# Altium PCB NEW_PCB.pcbdoc (part 1 of 2)
Units mil, origin at the board's own origin, x right, y up, seen from the top; angles counter-clockwise.
Board outline 5031.34 x 4281.32 mil, 2 copper layers (Top Layer, Bottom Layer); 79 components, 50 nets, 361 pads, 74 vias.
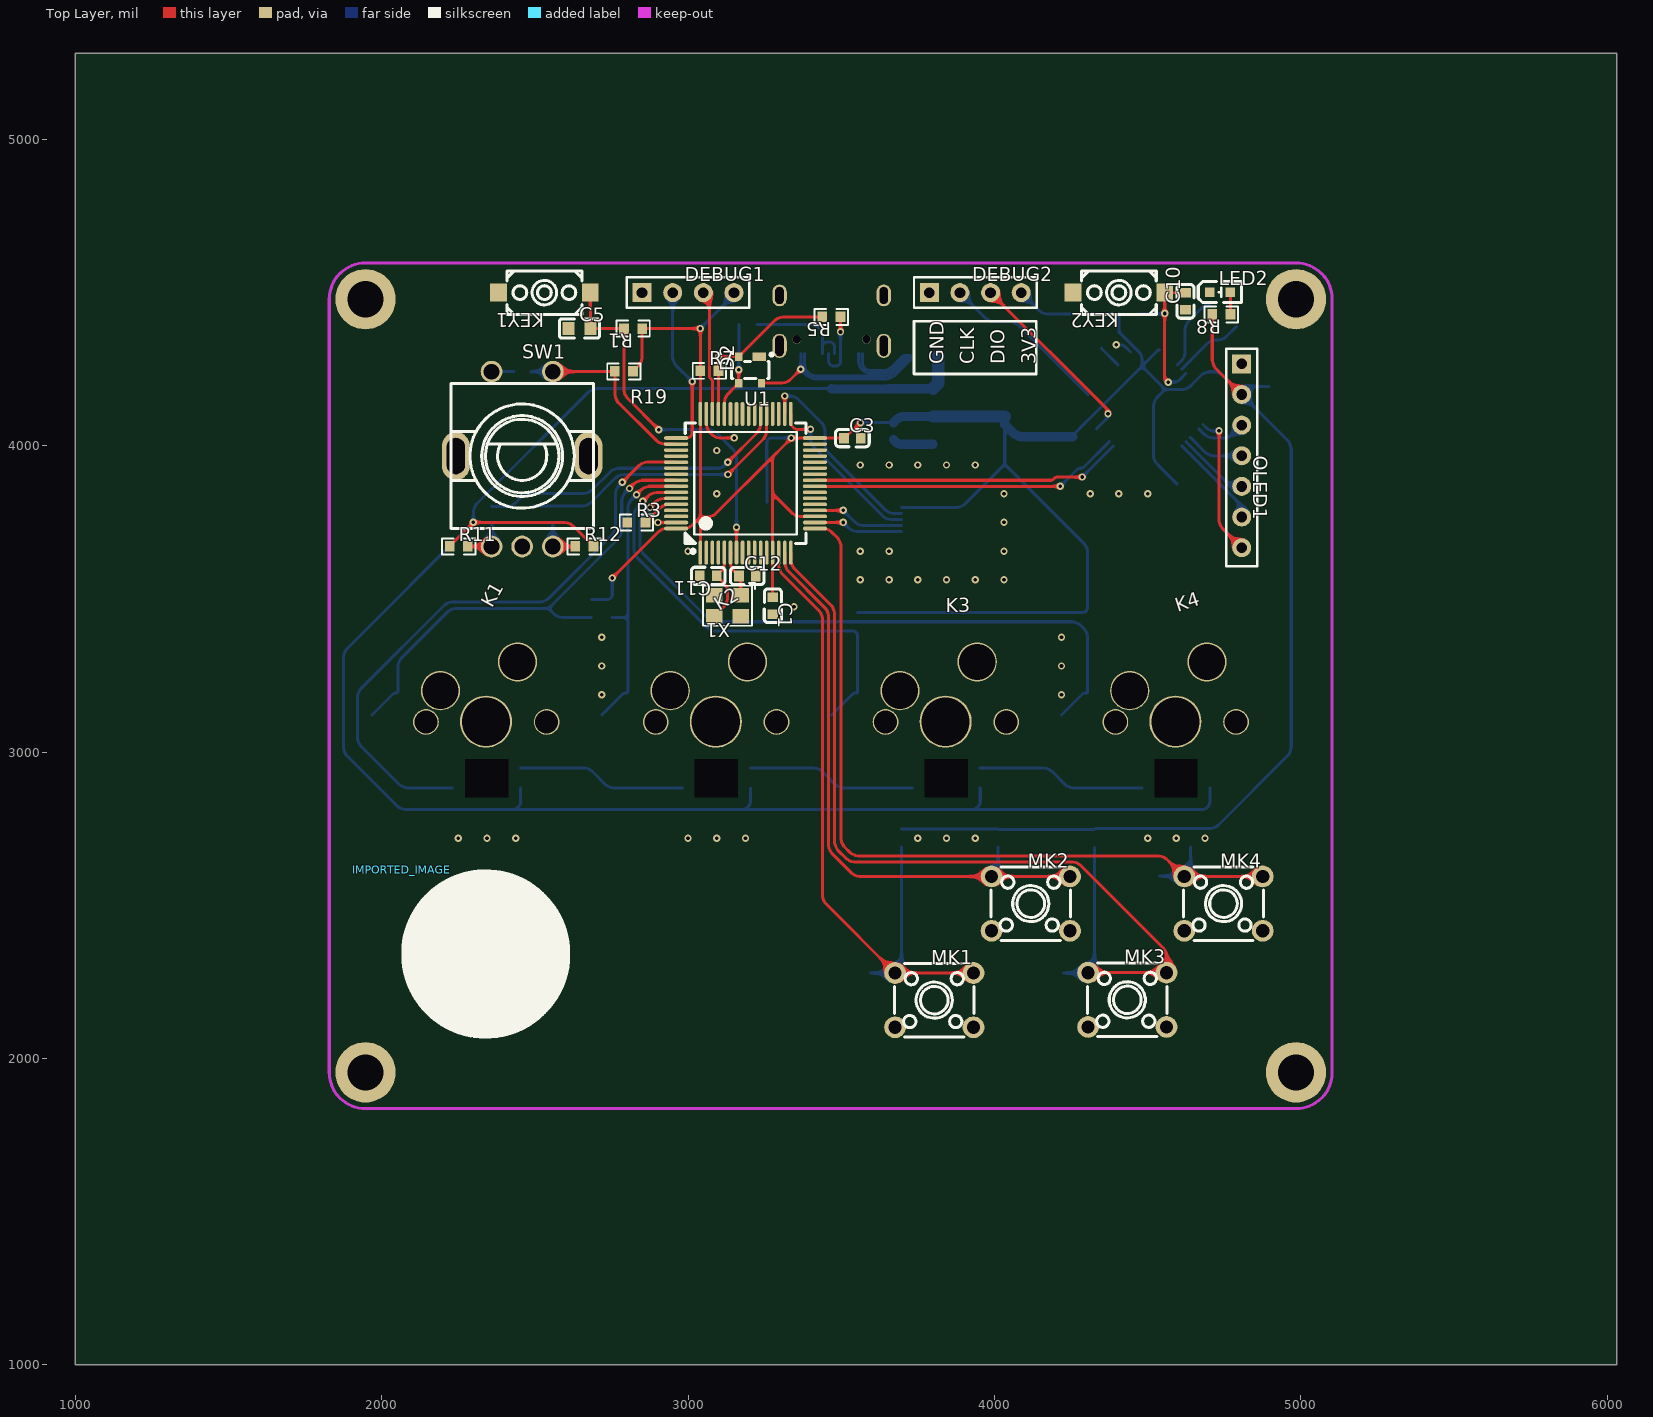
[diagram p0: Top Layer view]
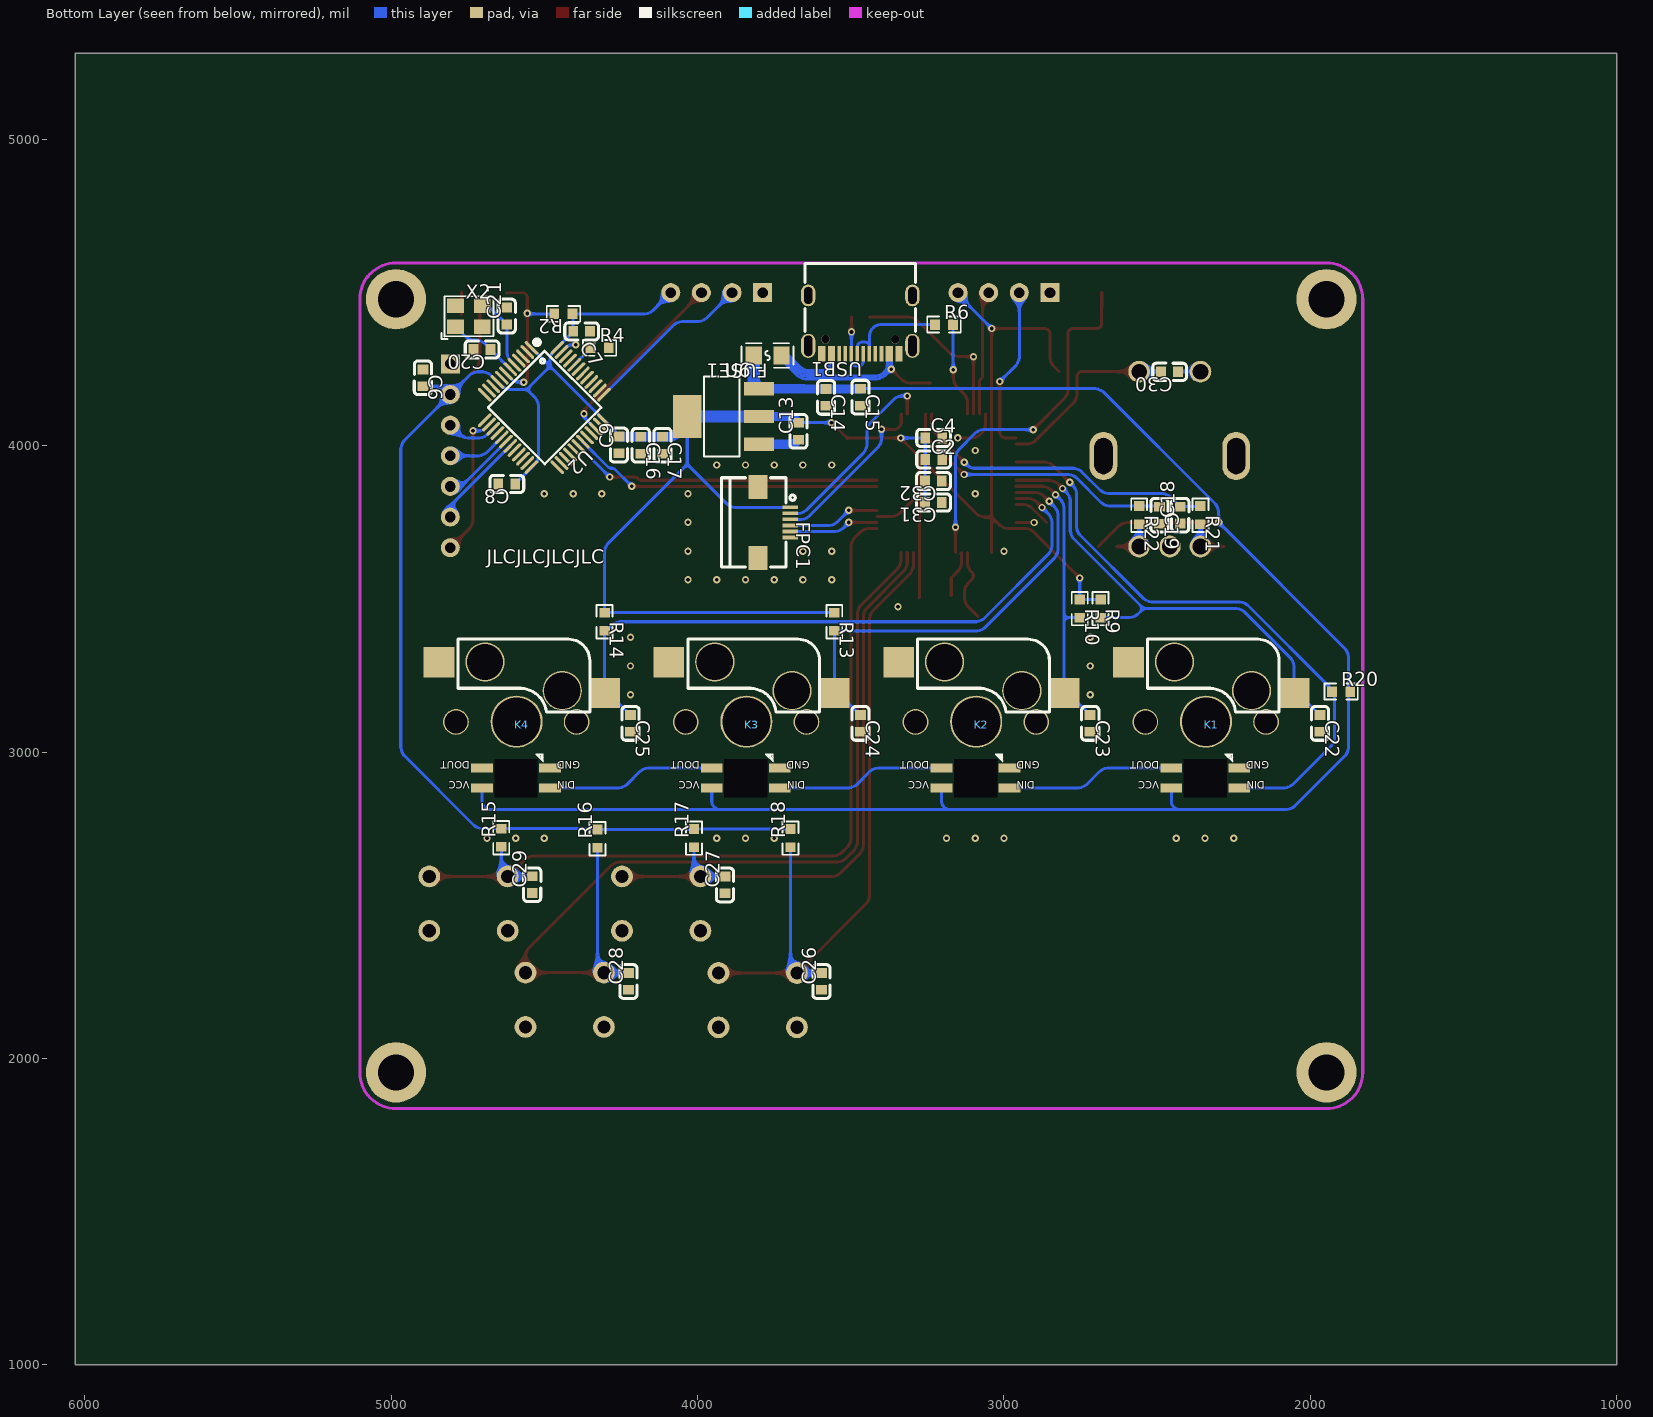
[diagram p1: Bottom Layer view, seen from below]

## Layer stack, top to bottom
Top Layer: signal copper (thickness not stored)
Dielectric: dielectric 12.6, FR-4, Dk 4.8
Bottom Layer: signal copper (thickness not stored)

## Board outline
6031.34,1000 1000,1000 1000,5281.32 6031.34,5281.32

## Components (designator, comment, footprint, x,y, rotation, side; value= is the part's Value field where it differs from the comment)
C1 "0.1u" C0603#1 3276.75,3477.78 r270 top
C2 "0.1u" C0603#2 3229.45,3955.38 r0 bottom
C3 "0.1u" C0603#1 3536.75,4024.78 r0 top
C4 "0.1u" C0603#2 3229.45,4025.78 r0 bottom
C5 "0.1u" C0603#3 2645.79,4382.78 r0 top
C6 "0.1u" C0603#2 4896.85,4221.78 r90 bottom
C7 "0.1u" C0603#2 4378.85,4373.78 r180 bottom
C8 "0.1u" C0603#2 4622.85,3875.78 r180 bottom
C9 "0.1u" C0603#2 4256.75,4002.78 r270 bottom
C10 "0.1u" C0603#1 4623.85,4471.78 r90 top
C11 "20pF" C0603#1 3065.79,3575.78 r180 top
C12 "20pF" C0603#1 3193.79,3574.78 r0 top
C13 "10u" C0603#2 3670.75,4047.78 r270 bottom
C14 "10u" C0603#2 3580.75,4157.78 r90 bottom
C15 "0.1u" C0603#2 3468.75,4158.78 r90 bottom
C16 "0.1u" C0603#2 4185.75,4001.78 r90 bottom
C17 "10u" C0603#2 4114.75,4001.78 r90 bottom
C18 "0.1u" C0603#2 2424.65,3773.88 r270 bottom
C19 "0.1u" C0603#2 2492.95,3773.28 r90 bottom
C20 "20p" C0603#2 4703.75,4314.78 r180 bottom
C21 "20p" C0603#2 4622.75,4423.78 r270 bottom
C22 "0.1u" C0603#2 1968.75,3093.78 r90 bottom
C23 "0.1u" C0603#2 2718.75,3093.78 r90 bottom
C24 "0.1u" C0603#2 3468.75,3093.78 r90 bottom
C25 "0.1u" C0603#2 4218.85,3093.78 r90 bottom
C26 "0.1u" C0603#2 3595.75,2251.78 r270 bottom
C27 "0.1u" C0603#2 3910.75,2566.78 r270 bottom
C28 "0.1u" C0603#2 4225.75,2251.78 r270 bottom
C29 "0.1u" C0603#2 4539.75,2567.78 r270 bottom
C30 "0.1u" C0603#2 2459.75,4241.78 r180 bottom
C31 "0.1u" C0603#2 3230.15,3814.78 r180 bottom
C32 "1u" C0603#2 3230.15,3885.18 r180 bottom
D2 "PRTR5V0U2X,215" SOT-143_L2.9-W1.3-P1.92-LS2.3-BR 3202.79,4247.78 r90 top
DEBUG1 "HDR-M-2.54_1x4" HDR-M-2.54_1X4 3000.05,4500.05 r0 top
DEBUG2 "HDR-M-2.54_1x4" HDR-M-2.54_1X4 3937.57,4500.05 r0 top
FPC1 "AFC01-S06FCA-00" FPC-SMD_P0.50-6P_AFC01-S06FCA-00 3750.05,3750.05 r90 bottom
FUSE1 "SMD0805B050TF" F0805 3771.79,4294.78 r180 bottom
IMPORTED_IMAGE "IMPORTED_IMAGE" IMPORTED_IMAGE 2064.98,2616.23 r0 top
K1 "凯华轴座下灯位" 凯华轴座下灯位 2340.86,3098.78 r0 top
K2 "凯华轴座下灯位" 凯华轴座下灯位 3090.88,3098.78 r0 top
K3 "凯华轴座下灯位" 凯华轴座下灯位 3840.89,3098.78 r0 top
K4 "凯华轴座下灯位" 凯华轴座下灯位 4590.91,3098.78 r0 top
KEY1 "K2-3.6×6.1_SMD" KEY-SMD_2P-L6.2-W3.6-LS8.0 2531.29,4500.05 r180 top
KEY2 "K2-3.6×6.1_SMD" KEY-SMD_2P-L6.2-W3.6-LS8.0 4406.33,4500.05 r180 top
LED2 "19-217/BHC-ZL1M2RY/3T" LED0603-R-RD_BLUE 4736.81,4501.78 r0 top
MK1 "K4-6×6_TH" KEY-TH_4P-L6.0-W6.0-P4.50-LS6.5 3803.79,2190.78 r0 top
MK2 "K4-6×6_TH" KEY-TH_4P-L6.0-W6.0-P4.50-LS6.5 4118.79,2505.78 r0 top
MK3 "K4-6×6_TH" KEY-TH_4P-L6.0-W6.0-P4.50-LS6.5 4433.79,2191.78 r0 top
MK4 "K4-6×6_TH" KEY-TH_4P-L6.0-W6.0-P4.50-LS6.5 4747.79,2505.78 r0 top
OLED1 "CONN_01X07" HDR-M-2.54_1X7 4807.35,3967.48 r270 top
R1 "10k" R0603#1 2820.75,4382.78 r180 top
R2 "10k" R0603#2 4437.85,4430.78 r180 bottom
R3 "10k" R0603#1 2831.75,3749.78 r0 top
R4 "10k" R0603#2 4319.85,4319.78 r0 bottom
R5 "22" R0603#1 3467.85,4420.78 r180 top
R6 "22" R0603#2 3195.75,4395.78 r0 bottom
R7 "1.5k" R0603#1 3069.75,4244.78 r0 top
R8 "1k" R0603#1 4740.85,4428.78 r180 top
R9 "10k" R0603#2 2684.75,3468.78 r90 bottom
R10 "10k" R0603#2 2752.75,3468.78 r90 bottom
R11 "10k" R0603#1 2251.75,3671.78 r0 top
R12 "10k" R0603#1 2661.75,3671.78 r0 top
R13 "10k" R0603#2 3553.75,3425.78 r90 bottom
R14 "10k" R0603#2 4303.75,3425.78 r90 bottom
R15 "10k" R0603#2 4640.75,2720.78 r270 bottom
R16 "10k" R0603#2 4326.75,2717.78 r270 bottom
R17 "10k" R0603#2 4011.75,2719.78 r270 bottom
R18 "10k" R0603#2 3696.75,2719.78 r270 bottom
R19 "10k" R0603#1 2790.79,4242.78 r0 top
R20 "10k" R0603#2 1899.75,3197.78 r0 bottom
R21 "10k" R0603#2 2358.75,3773.58 r90 bottom
R22 "10k" R0603#2 2558.75,3773.58 r90 bottom
SW1 "EC11E18244A5" SW-TH_EC11E18244A5 2458.79,3956.78 r0 top
U1 "STM32F303RBT6" LQFP-64_L10.0-W10.0-P0.50-LS12.0-BL 3187.79,3877.78 r0 top
U2 "STM32F030CCT6" LQFP-48_L7.0-W7.0-P0.50-LS9.0-BL 4500.08,4125.04 r135 bottom
U6 "AMS1117-3.3" SOT-223-3_L6.5-W3.4-P2.30-LS7.0-BR 3916.79,4095.78 r0 bottom
USB1 "KH-TYPE-C-16P" USB-C-SMD_KH-TYPE-C-16P 3468.81,4395.78 r180 bottom
X1 "8MHz" OSC-SMD_4P-L3.2-W2.5-BL#1 3128.79,3477.78 r180 top
X2 "8MHz" OSC-SMD_4P-L3.2-W2.5-BL#2 4746.32,4423.31 r0 bottom

## Footprints (in the part's own frame and the unit in brackets; to place one, negate y for a bottom-side part, rotate by r counter-clockwise, add the part's x,y. Pads: shape width x height; smd on the part's side, far side on the other; paste and mask are expansions set on the pad)
C0603#1 [mm]
  rect 0.8x0.9 smd paste+0 mask+0.051: 1(-0.7,0) 2(0.7,0)
  silkscreen extent -1.41,-0.71 1.39,0.72
C0603#2 [mm]
  rect 0.8x0.9 smd paste+0 mask+0.051: 1(0.7,0) 2(-0.7,0)
  silkscreen extent -1.39,-0.72 1.41,0.71
C0603#3 [mm]
  rect 1x1.1 smd paste+0 mask+0.102: 1(-0.9,0) 2(0.9,0)
  silkscreen extent -1.65,-0.8 1.65,0.8
F0805 [mm]
  rect 1.335x1.5 smd paste-100 mask+0.051: 1(1.142,0) 2(-1.142,0)
  silkscreen extent -2.16,-1.02 2.16,1.02
FPC-SMD_P0.50-6P_AFC01-S06FCA-00 [mm]
  rect 0.3x1.3 smd paste+0 mask+0.051: 1(1.248,-1.339) 2(0.748,-1.339) 3(0.248,-1.339) 4(-0.252,-1.339) 5(-0.752,-1.339) 6(-1.252,-1.339)
  rect 2x1.6 smd paste+0 mask+0.051: 7(2.95,1.339) 8(-2.95,1.339)
  silkscreen extent -3.7,-1.75 3.72,4.36
HDR-M-2.54_1X4 [mil]
  rect 62x62 hole 35 paste+0 mask+2: 1(-150,0)
  round 62 hole 35 paste+0 mask+2: 2(-50,0) 3(50,0) 4(150,0)
  silkscreen extent -200,-50 200,50
HDR-M-2.54_1X7 [mil]
  rect 62x62 hole 35 paste+0 mask+2: 1(-300,0)
  round 62 hole 35 paste+0 mask+2: 2(-200,0) 3(-100,0) 4(0,0) 5(100,0) 6(200,0) 7(300,0)
  silkscreen extent -350,-50 360,50
IMPORTED_IMAGE [mil]
  silkscreen extent 0,-550 550,0
KEY-SMD_2P-L6.2-W3.6-LS8.0 [mm]
  rect 1.4x1.5 smd paste+0 mask+0.051: 1(-3.8,0) 2(3.8,0)
  silkscreen extent -3.1,-1.8 3.1,1.8
KEY-TH_4P-L6.0-W6.0-P4.50-LS6.5 [mm]
  round 1.8 hole 1.1 paste+0 mask+0.051: 1(-3.251,-2.25) 2(3.251,-2.25) 3(3.251,2.25) 4(-3.251,2.25)
  silkscreen extent -3.3,-3.05 3.3,3.05
LED0603-R-RD_BLUE [mm]
  rect 0.8x0.8 smd paste+0 mask+0.051: 1(0.851,0) 2(-0.851,0)
  silkscreen extent -1.82,-0.86 1.77,0.86
LQFP-48_L7.0-W7.0-P0.50-LS9.0-BL [mm]
  oval 0.27x1.5 smd paste+0 mask+0.05: 1(2.75,4.25) 2(2.25,4.25) 3(1.75,4.25) 4(1.25,4.25) 5(0.75,4.25) 6(0.25,4.25) 7(-0.25,4.25) 8(-0.75,4.25) 9(-1.25,4.25) 10(-1.75,4.25) 11(-2.25,4.25) 12(-2.75,4.25) 25(-2.75,-4.25) 26(-2.25,-4.25) 27(-1.75,-4.25) 28(-1.25,-4.25) 29(-0.75,-4.25) 30(-0.25,-4.25) 31(0.25,-4.25) 32(0.75,-4.25) 33(1.25,-4.25) 34(1.75,-4.25) 35(2.25,-4.25) 36(2.75,-4.25)
  oval 1.5x0.27 smd paste+0 mask+0.05: 13(-4.25,2.75) 14(-4.25,2.25) 15(-4.25,1.75) 16(-4.25,1.25) 17(-4.25,0.75) 18(-4.25,0.25) 19(-4.25,-0.25) 20(-4.25,-0.75) 21(-4.25,-1.25) 22(-4.25,-1.75) 23(-4.25,-2.25) 24(-4.25,-2.75) 37(4.25,-2.75) 38(4.25,-2.25) 39(4.25,-1.75) 40(4.25,-1.25) 41(4.25,-0.75) 42(4.25,-0.25) 43(4.25,0.25) 44(4.25,0.75) 45(4.25,1.25) 46(4.25,1.75) 47(4.25,2.25) 48(4.25,2.75)
  silkscreen extent -3.3,-3.34 3.59,4.46
LQFP-64_L10.0-W10.0-P0.50-LS12.0-BL [mm]
  oval 0.3x2 smd paste+0 mask+0.051: 1(-3.75,-5.75) 2(-3.25,-5.75) 3(-2.75,-5.75) 4(-2.25,-5.75) 5(-1.75,-5.75) 6(-1.25,-5.75) 7(-0.75,-5.75) 8(-0.25,-5.75) 9(0.25,-5.75) 10(0.75,-5.75) 11(1.25,-5.75) 12(1.75,-5.75) 13(2.25,-5.75) 14(2.75,-5.75) 15(3.25,-5.75) 16(3.75,-5.75) 33(3.75,5.75) 34(3.25,5.75) 35(2.75,5.75) 36(2.25,5.75) 37(1.75,5.75) 38(1.25,5.75) 39(0.75,5.75) 40(0.25,5.75) 41(-0.25,5.75) 42(-0.75,5.75) 43(-1.25,5.75) 44(-1.75,5.75) 45(-2.25,5.75) 46(-2.75,5.75) 47(-3.25,5.75) 48(-3.75,5.75)
  oval 2x0.3 smd paste+0 mask+0.051: 17(5.75,-3.75) 18(5.75,-3.25) 19(5.75,-2.75) 20(5.75,-2.25) 21(5.75,-1.75) 22(5.75,-1.25) 23(5.75,-0.75) 24(5.75,-0.25) 25(5.75,0.25) 26(5.75,0.75) 27(5.75,1.25) 28(5.75,1.75) 29(5.75,2.25) 30(5.75,2.75) 31(5.75,3.25) 32(5.75,3.75) 49(-5.75,3.75) 50(-5.75,3.25) 51(-5.75,2.75) 52(-5.75,2.25) 53(-5.75,1.75) 54(-5.75,1.25) 55(-5.75,0.75) 56(-5.75,0.25) 57(-5.75,-0.25) 58(-5.75,-0.75) 59(-5.75,-1.25) 60(-5.75,-1.75) 61(-5.75,-2.25) 62(-5.75,-2.75) 63(-5.75,-3.25) 64(-5.75,-3.75)
  silkscreen extent -5,-5.79 5,5
OSC-SMD_4P-L3.2-W2.5-BL#1 [mm]
  rect 1.4x1.2 smd paste+0 mask+0.051: 1(-1.1,-0.875) 2(1.1,-0.875) 3(1.1,0.875) 4(-1.1,0.875)
  silkscreen extent -2.29,-1.9 2.03,1.65
OSC-SMD_4P-L3.2-W2.5-BL#2 [mm]
  rect 1.4x1.2 smd paste+0 mask+0.051: 1(1.1,0.875) 2(-1.1,0.875) 3(-1.1,-0.875) 4(1.1,-0.875)
  silkscreen extent -2.03,-1.65 2.29,1.9
R0603#1 [mil]
  rect 31.75x34.02 smd paste-3937.01 mask+2: 1(-29.66,0) 2(29.65,0)
  silkscreen extent -55,-26 55,26
R0603#2 [mil]
  rect 31.75x34.02 smd paste-3937.01 mask+2: 1(29.65,0) 2(-29.66,0)
  silkscreen extent -55,-26 55,26
SOT-143_L2.9-W1.3-P1.92-LS2.3-BR [mm]
  rect 0.7x1.1 smd paste+0 mask+0.051: 1(1.1,-0.75)
  rect 0.7x0.6 smd paste+0 mask+0.051: 2(1.1,0.95) 3(-1.1,0.95) 4(-1.1,-0.95)
  silkscreen extent -0.7,-1.91 1.4,1.55
SOT-223-3_L6.5-W3.4-P2.30-LS7.0-BR [mm]
  rect 2.5x1.1 smd paste+0 mask+0.051: 1(-2.97,2.3) 2(-2.97,0) 3(-2.97,-2.3)
  rect 2.34x3.6 smd paste+0 mask+0.051: 4(2.97,0)
  silkscreen extent -1.37,-3.33 1.57,3.33
SW-TH_EC11E18244A5 [mm]
  oval 2.3x4 hole 1.5 slot 3 at 90 deg paste+0 mask+0.051: 6(5.5,0.25) 7(-5.5,0.25)
  round 1.8 hole 1.3 paste+0 mask+0.051: A(-2.54,-7.25) B(2.54,-7.25) C(0,-7.25) D(-2.54,7.25) E(2.54,7.25)
  silkscreen extent -5.9,-5.75 5.9,6.25
USB-C-SMD_KH-TYPE-C-16P [mm]
  oval 1.2x2 hole 0.7 slot 1.7 at 90 deg paste+0 mask+0.051: 1(4.32,-1.765) 2(-4.32,-1.765)
  oval 1.2x1.8 hole 0.7 slot 1.4 at 90 deg paste+0 mask+0.051: 3(4.32,2.415) 4(-4.32,2.415)
  rect 0.3x1.3 smd paste-100 mask+0.05: A1(3.35,-2.415) A4(2.55,-2.415) A5(1.25,-2.415) A6(0.25,-2.415) A7(-0.25,-2.415) A8(-1.25,-2.415) A9(-2.55,-2.415) A12(-3.35,-2.415) B1(-3.05,-2.415) B4(-2.25,-2.415) B5(-1.75,-2.415) B6(-0.75,-2.415) B7(0.75,-2.415) B8(1.75,-2.415) B9(2.25,-2.415) B12(3.05,-2.415)
  round 0.7 hole 0.7 unplated paste+0: ""(-2.89,-1.235) ""(2.89,-1.235)
  silkscreen extent -4.57,-0.57 4.57,5.08
凯华轴座下灯位 [mil]
  rect 100.39x98.42 smd far side paste+0 mask+4: COL(-287.08,95) ROW(252.92,195)
  rect 70.87x29.53 smd far side paste+0 mask+4: DIN(-109.08,-215) DOUT(112.92,-150) GND(-109.08,-150) VCC(112.92,-215)
  round 84 hole 74.8 unplated paste+0 mask+4: ""(-196.08,0) ""(197.92,0)
  round 128 hole 118.11 paste+0 mask+4: ""(-149.08,102) ""(102.92,196)
  round 170 hole 157.48 paste+0 mask+4: ""(-0.08,1)
  Multi-Layer board cut-out: 71.92,-246 71.92,-121.59 -68.24,-121.59 -68.24,-246

## Free pads (board coordinates)
  rect 11.81x51.18 smd paste+0 mask+2: 2(3079.52,4104.14)
  round 196.85 hole 118.11 paste+0 mask+2: 3(1947.15,4478.57) 4(1947.15,1954.99) 5(4984.52,1954.99) 6(4984.52,4478.57)

## Via types
v1: diameter 24, hole 12, Top Layer to Bottom Layer, tented both sides, 74 vias

## Nets (pads, with @x,y where several pads share a name; then routed paths per layer and width w, separated by ;. In a path a pad name is that pad's centre, name@x,y a point inside that pad or via, vN(x,y) a via of type N, cw(c..) or ccw(c..) an arc to the next point about the centre after c; other vN are vias at no path point)
+5V: C14.1 C15.1 FUSE1.2 K1.VCC K2.VCC K3.VCC K4.VCC R11.1 R12.2 R20.2 U6.3 | length 6632.5
  Top Layer w10: R11.1@2222.09,3671.78 2222.14,3672.78 v1(2299.41,3750.05) 2598.51,3750.05 2607.49,3748.26 2615.94,3744.76 2623.55,3739.68 R12.2@2691.4,3671.78 ; 2290.87,3741.51 cw(c2311.47,3720.91) 2311.47,3750.05
  Bottom Layer w10: 2290.91,3741.55 ccw(c2270.3,3762.16) 2299.45,3762.16 ; 2425.45,2812.53 ccw(c2425.45,2841.67) 2446.06,2821.06 ; K1.VCC@2453.78,2883.78 2453.78,2837.55 2452.71,2832.18 2450.62,2827.14 2447.58,2822.59 2437.52,2812.53 ; 3175.47,2812.53 ccw(c3175.47,2841.67) 3196.07,2821.06 ; K2.VCC@3203.79,2883.78 3203.8,2837.55 3202.73,2832.19 3200.64,2827.14 3197.6,2822.59 3187.54,2812.53 ; C15.1@3459.8,4186.38 2701.01,4186.38 2692.04,4184.6 2683.59,4181.09 2675.98,4176.01 2309.82,3809.85 2304.73,3802.24 2301.23,3793.79 2299.45,3784.82 2299.45,3750.09 1885.38,3336.02 1880.29,3328.41 1876.79,3319.96 1875.01,3310.99 1875.01,3014.7 1876.79,3005.72 1880.29,2997.27 1885.38,2989.66 2052.14,2822.9 2059.75,2817.81 2068.2,2814.31 2077.18,2812.53 2437.52,2812.53 ; 3925.48,2812.53 ccw(c3925.48,2841.67) 3946.09,2821.06 ; K3.VCC@3953.81,2883.78 3953.81,2837.54 3952.74,2832.18 3950.65,2827.13 3947.61,2822.59 3937.55,2812.53 ; K4.VCC@4703.82,2883.78 4703.83,2837.55 4702.76,2832.19 4700.67,2827.14 4697.63,2822.59 4693.76,2818.72 4689.22,2815.69 4684.17,2813.59 4678.81,2812.53 3937.55,2812.53 ; 2437.52,2812.53 3187.54,2812.53 ; 3187.54,2812.53 3937.55,2812.53
  Bottom Layer w30: C15.1@3468.8,4186.33 3469.8,4185.33 3580.8,4185.33 3653.35,4185.33 3654.34,4186.33 U6.3@3799.86,4186.33 ; U6.3@3779.28,4186.33 ccw(c3779.28,4218.8) U6.3@3802.24,4195.84
  Bottom Layer w40: U6.3@3799.85,4186.38 3816.75,4203.28 FUSE1.2@3816.75,4294.78 ; U6.3@3805.77,4192.31 ccw(c3779.28,4218.8) 3816.75,4218.8
ADC1: FPC1.5 U1.18 | length 293.3
  Top Layer w10: U1.18@3414.15,3749.78 3468.79,3749.89 v1@3506.25,3749.97
  Bottom Layer w10: v1(3506.43,3749.97) 3525.58,3730.81 3533.19,3725.73 3541.64,3722.22 3550.61,3720.44 FPC1.5@3697.32,3720.44
ADC2: FPC1.4 U1.20 | length 301.8
  Top Layer w10: U1.20@3414.17,3789.2 v1@3506.59,3789.19
  Bottom Layer w10: v1(3506.43,3789.19) 3545.12,3750.49 3552.73,3745.41 3561.18,3741.91 3570.16,3740.12 FPC1.4@3697.32,3740.12
ADC3: FPC1.3 U1.33 | length 547.9
  Top Layer w10: U1.33@3335.43,4104.15 3335.43,4073.42 3339.16,4064.41 3346.06,4057.51 3355.07,4053.78 v1(3399.8,4053.78)
  Bottom Layer w10: v1@3399.75,4053.78 3399.75,4021.24 3401.53,4012.27 3405.03,4003.82 3410.12,3996.21 3636.15,3770.18 3643.76,3765.1 3652.21,3761.59 3661.18,3759.81 FPC1.3@3697.32,3759.81
ADC4: FPC1.2 U1.34 | length 636.2
  Top Layer w10: U1.34@3315.8,4104.2 v1(3315.8,4162.78)
  Bottom Layer w10: v1@3315.75,4162.78 3336.17,4162.78 3343.87,4161.25 3351.12,4158.25 3357.64,4153.89 3437.38,4074.15 3442.46,4066.54 3445.96,4058.09 3447.75,4049.11 3447.75,4002.44 3449.53,3993.47 3453.03,3985.02 3458.11,3977.41 3645.67,3789.86 3653.28,3784.78 3661.73,3781.28 3670.7,3779.49 FPC1.2@3697.32,3779.49
DN: R6.1 USB1.A7 USB1.B7 | length 366.5
  Bottom Layer w10: R6.1@3225.4,4395.78 3404.92,4395.78 3412.36,4394.25 3419.34,4391.26 3425.58,4386.93 3430.84,4381.41 3434.96,4374.99 3437.8,4367.89 3439.25,4360.38 3439.25,4329.28 ; USB1.B7@3439.25,4300.68 3439.25,4329.28 ; USB1.A7@3478.65,4300.69 3478.65,4325.24 3476.07,4331.45 3471.32,4336.21 3465.11,4338.78 3452.24,4338.78 3446.28,4336.31 3439.25,4329.28
DP: R5.1 USB1.A6 USB1.B6 | length 224.9
  Top Layer w10: v1@3497.45,4372.18 R5.1@3497.45,4420.78
  Bottom Layer w10: USB1.A6@3458.95,4300.68 3458.95,4274.2 3461.52,4268.03 3466.28,4263.33 3472.47,4260.78 3485.36,4260.78 3491.32,4263.25 3495.88,4267.81 3498.35,4273.77 USB1.B6@3498.34,4300.7 ; USB1.B6@3497.85,4301.18 v1(3497.81,4371.78)
EC11A: C18.2 R21.1 U1.38 | length 1022.9
  Top Layer w10: v1(3129.8,3946.78) 3226.68,4043.66 3231.76,4051.27 3235.26,4059.72 3237.05,4068.7 U1.38@3237.05,4104.18
  Bottom Layer w10: R21.1@2358.79,3803.28 2360.59,3801.49 2410.01,3801.49 2418.98,3803.27 2427.43,3806.77 2435.04,3811.85 2456.62,3833.43 2464.22,3838.51 2472.68,3842.01 2481.65,3843.8 2660.1,3843.8 2669.08,3845.59 2677.53,3849.09 2685.14,3854.17 2747.38,3916.41 2754.98,3921.49 2763.44,3924.99 2772.41,3926.78 3098.97,3926.78 3105.57,3928.09 3111.78,3930.66 3117.37,3934.4 v1@3129.75,3946.78
EC11B: C19.1 R22.1 U1.37 | length 925.8
  Top Layer w10: v1(3130.25,3906.28) 3246.28,4022.31 3251.36,4029.92 3254.86,4038.37 3256.65,4047.34 U1.37@3256.65,4104.18
  Bottom Layer w10: C19.1@2492.91,3800.88 2495.32,3803.29 2558.79,3803.29 2656.59,3803.29 2665.56,3805.07 2674.01,3808.57 2681.62,3813.66 2764.38,3896.41 2771.99,3901.49 2780.44,3904.99 2789.41,3906.76 v1(3130.25,3906.28)
GND: C1.2 C2.2 C3.2 C4.2 C5.1 C6.1 C7.1 C8.2 C9.1 C10.1 C11.2 C12.2 C13.1 C14.2 C15.2 C16.2 C17.2 C18.1 C19.2 C20.2 C21.2 C22.2 C23.2 C24.2 C25.2 C26.1 C27.1 C28.1 C29.1 C30.1 C31.1 C32.1 D2.1 DEBUG1.1 DEBUG2.1 FPC1.6 K1.GND K1.ROW K2.GND K2.ROW K3.GND K3.ROW K4.GND K4.ROW KEY1.2 KEY2.2 LED2.2 MK1.1 MK1.2 MK2.1 MK2.2 MK3.1 MK3.2 MK4.1 MK4.2 OLED1.1 pad.3 pad.4 pad.5 pad.6 R3.1 R4.2 SW1.6 SW1.7 SW1.C SW1.D U1.12 U1.31 U1.47 U1.63 U2.8 U2.23 U2.35 U2.47 U6.1 USB1.1 USB1.2 USB1.3 USB1.4 USB1.A1 USB1.A12 USB1.B1 USB1.B12 X1.2 X1.4 X2.2 X2.4 | length 470.9
  Top Layer w10: v1(2901.8,3749.78) U1.63@2961.42,3749.82 ; U1.47@3059.84,4104.15 3059.84,4069.39 3061.62,4060.42 3065.12,4051.97 3070.2,4044.36 3078.42,4036.15 3086.03,4031.07 3094.48,4027.57 3103.45,4025.78 v1(3150.8,4025.78) ; U1.63@2961.42,3749.82 U1.63@2961.42,3749.82
  Bottom Layer w10: SW1.D@2358.79,4242.21 C30.1@2431.81,4242.21 ; v1(4397.8,4329.78) 4411.91,4329.78 4417.23,4328.72 4422.24,4326.65 4426.76,4323.63 U2.47@4444.4,4305.99
  Bottom Layer w30: C13.1@3670.79,4020.22 3680.07,4010.94 3684.26,4008.14 3688.91,4006.21 3693.86,4005.23 U6.1@3799.86,4005.22
  other v1: 2250.02,2718.78 2343.77,2718.78 2437.52,2718.78 3000.04,2718.78 3093.79,2718.78 3187.54,2718.78 3750.05,2718.78 3843.8,2718.78 3937.56,2718.78 4500.07,2718.78 4593.82,2718.78 4687.57,2718.78 2718.78,3187.54 4218.81,3187.54 2718.78,3281.29 4218.81,3281.29 2718.78,3375.04 4218.81,3375.04 3345.8,3474.78 3562.55,3562.54 3656.3,3562.54 3750.05,3562.54 3750.05,3562.54 3843.8,3562.54 3937.56,3562.54 4031.31,3562.54 3000.04,3656.3 3562.55,3656.3 3656.3,3656.3 4031.31,3656.3 4031.31,3750.05 3093.79,3843.8 4031.31,3843.8 4312.56,3843.8 4406.32,3843.8 4500.07,3843.8 3562.55,3937.55 3656.3,3937.55 3750.05,3937.55 3843.8,3937.55 3937.56,3937.55 3093.8,3984.78
K1_DOUT: K1.DOUT K2.DIN | length 551.3
  Bottom Layer w10: K1.DOUT@2453.75,2948.78 2661.58,2948.78 2670.56,2946.99 2679.01,2943.49 2686.62,2938.41 2730.88,2894.15 2738.49,2889.07 2746.94,2885.57 2755.91,2883.78 K2.DIN@2981.79,2883.78
K2_DOUT: K2.DOUT K3.DIN | length 551.2
  Bottom Layer w10: K2.DOUT@3203.75,2948.78 3411.58,2948.78 3420.56,2947 3429.01,2943.5 3436.62,2938.42 3480.97,2894.14 3488.58,2889.06 3497.04,2885.56 3506.01,2883.78 K3.DIN@3731.81,2883.78
K3_DOUT: K3.DOUT K4.DIN | length 551.2
  Bottom Layer w10: K3.DOUT@3953.81,2948.78 4161.68,2948.78 4170.66,2946.99 4179.11,2943.49 4186.72,2938.41 4230.98,2894.15 4238.59,2889.07 4247.04,2885.57 4256.01,2883.78 K4.DIN@4481.82,2883.78
K_1: C22.1 K1.COL R9.2 U1.56 | length 1653.2
  Top Layer w10: v1@2808.75,3860.78 2825.4,3877.37 2832.91,3882.37 2841.26,3885.82 2850.12,3887.58 U1.56@2961.42,3887.61
  Bottom Layer w10: C22.1@1968.76,3121.34 2038.89,3191.47 2044.46,3193.78 2050.07,3193.78 2053.75,3197.46 2053.75,3282.12 2055.53,3291.09 2059.03,3299.54 2064.12,3307.15 2215.47,3458.41 2223.08,3463.49 2231.54,3467 2240.51,3468.78 2544.85,3468.78 ; 2553.38,3460.24 ccw(c2532.78,3439.64) 2532.78,3468.78 ccw(c2532.77,3497.91) 2553.38,3477.32 ; 2555.45,3458.17 cw(c2566.06,3468.78) 2555.45,3479.39 ; R9.2@2684.79,3439.12 2589.18,3439.12 2580.2,3440.9 2571.75,3444.4 2564.14,3449.49 2544.85,3468.78 ; v1@2808.75,3860.78 2793.28,3845.31 2788.6,3838.32 2785.39,3830.55 2783.75,3822.31 2783.75,3722.44 2781.96,3713.47 2778.46,3705.02 2773.38,3697.41 2544.85,3468.78
  other v1: 2808.8,3860.78
K_2: C23.1 K2.COL R10.2 U1.57 | length 1006.2
  Top Layer w10: v1(2831.8,3840.78) 2848.62,3857.61 2856.2,3862.69 2864.63,3866.2 2873.58,3867.98 U1.57@2961.45,3867.98
  Bottom Layer w10: C23.1@2718.78,3121.34 2788.91,3191.48 2794.47,3193.78 2800.08,3193.78 2803.75,3197.45 2803.75,3439.12 ; R10.2@2752.79,3439.12 2803.75,3439.12 ; 2803.75,3424.12 ccw(c2788.75,3424.12) 2788.75,3439.12 ccw(c2788.75,3454.12) 2803.75,3454.12 ; v1(2831.8,3840.78) 2814.13,3823.13 2809.04,3815.53 2805.53,3807.09 2803.75,3798.12 2803.75,3439.12
K_3: C24.1 K3.COL R13.2 U1.58 | length 1442.1
  Top Layer w10: v1@2852.75,3818.78 2871.88,3837.91 2879.49,3842.99 2887.94,3846.49 2896.91,3848.28 U1.58@2961.45,3848.28
  Bottom Layer w10: v1@2852.75,3818.78 2834.12,3800.15 2829.03,3792.54 2825.53,3784.09 2823.75,3775.12 2823.75,3659.74 2825.53,3650.77 2829.03,3642.32 2834.12,3634.71 3062.34,3406.49 3069.95,3401.4 3078.4,3397.9 3087.38,3396.12 3540.07,3396.12 3546.35,3393.52 3551.15,3388.72 3553.75,3382.44 K3.COL@3553.81,3193.78 ; C24.1@3468.79,3121.34 3538.92,3191.47 3544.5,3193.78 K3.COL@3553.81,3193.78
  other v1: 2852.79,3818.78
K_4: C25.1 K4.COL R14.2 U1.59 | length 2123.7
  Top Layer w10: v1(2875.8,3798.78) 2895.2,3818.19 2902.79,3823.28 2911.24,3826.79 2920.21,3828.58 U1.59@2961.42,3828.57
  Bottom Layer w10: v1(2875.8,3798.78) 2854.13,3777.13 2849.04,3769.53 2845.53,3761.09 2843.75,3752.12 2843.75,3672.44 2845.53,3663.47 2849.03,3655.02 2854.12,3647.41 3065.38,3436.15 3072.99,3431.07 3081.44,3427.57 3090.41,3425.78 4255.08,3425.78 4264.06,3423.99 4272.51,3420.49 4280.12,3415.41 4293.48,3402.05 4298.56,3394.44 4302.06,3385.99 4303.85,3377.02 K4.COL@4303.82,3193.78 4294.51,3193.78 4288.93,3191.47 C25.1@4218.85,3121.34
LED2_1: LED2.1 R8.1 | length 73
  Top Layer w10: LED2.1@4770.31,4501.77 R8.1@4770.45,4428.78
MK_1: C26.2 MK1.3 MK1.4 R18.1 U1.14 | length 2347.8
  Top Layer w10: U1.14@3296.05,3651.38 3296.05,3608.14 3297.83,3599.17 3301.33,3590.72 3306.42,3583.11 3428.38,3461.15 3433.46,3453.54 3436.96,3445.09 3438.75,3436.12 3438.75,2531.04 3440.53,2522.07 3444.03,2513.62 3449.12,2506.01 3675.85,2279.38 MK1.3@3931.79,2279.38 ; MK1.4@3667.31,2287.91 ccw(c3687.92,2308.53) MK1.4@3687.92,2279.38
  Bottom Layer w10: C26.2@3595.8,2279.33 3675.74,2279.33 3696.8,2300.39 R18.1@3696.8,2690.12 ; MK1.4@3663.67,2279.33 ccw(c3663.67,2308.47) MK1.4@3684.28,2287.87 ; MK1.4@3688.26,2291.85 ccw(c3667.66,2312.46) 3696.8,2312.46
MK_2: C27.2 MK2.3 MK2.4 R17.1 U1.15 | length 2076.5
  Top Layer w10: U1.15@3315.74,3651.4 3315.74,3617.49 3317.52,3608.52 3321.02,3600.07 3326.11,3592.46 3448.42,3470.14 3453.51,3462.54 3457.01,3454.09 3458.79,3445.11 3458.79,2695.44 3460.58,2686.47 3464.08,2678.01 3469.16,2670.41 3534.86,2604.7 3542.47,2599.62 3550.92,2596.12 3559.9,2594.34 3888.79,2594.34 ; 3888.75,2594.38 MK2.4@3990.79,2594.38 ; MK2.4@3990.79,2594.38 MK2.3@4246.79,2594.38
  Bottom Layer w10: C27.2@3910.8,2594.33 3990.74,2594.33 4011.8,2615.39 R17.1@4011.8,2690.12 ; MK2.4@3978.67,2594.33 ccw(c3978.67,2623.47) MK2.4@3999.28,2602.87 ; MK2.4@4003.26,2606.85 ccw(c3982.66,2627.46) 4011.8,2627.46
MK_3: C28.2 MK3.3 MK3.4 R16.1 U1.16 | length 3126.5
  Top Layer w10: U1.16@3335.43,3651.4 3335.45,3625.84 3337.23,3616.87 3340.73,3608.42 3345.81,3600.81 3468.38,3478.15 3473.46,3470.54 3476.96,3462.09 3478.75,3453.11 3478.75,2705.44 3480.53,2696.47 3484.03,2688.02 3489.12,2680.41 3517.38,2652.15 3524.99,2647.07 3533.44,2643.57 3542.41,2641.78 4256.08,2641.78 4265.06,2639.99 4273.51,2636.49 4281.12,2631.41 4551.38,2361.15 4556.46,2353.54 4559.96,2345.09 4561.75,2336.12 4561.75,2280.38 MK3.4@4305.79,2280.38 ; MK3.3@4546.75,2280.38 ccw(c4546.75,2295.38) MK3.3@4561.75,2295.38
  Bottom Layer w10: C28.2@4225.8,2279.33 MK3.4@4304.74,2279.33 ; MK3.4@4292.67,2279.33 ccw(c4292.67,2308.47) MK3.4@4313.27,2287.87 ; MK3.4@4305.79,2280.38 MK3.4@4304.75,2279.33 ; MK3.4@4318.26,2292.85 ccw(c4297.65,2313.46) 4326.8,2313.46 ; R16.1@4326.8,2688.12 4326.8,2301.39 MK3.4@4304.74,2279.33
MK_4: C29.2 MK4.3 MK4.4 R15.1 U1.17 | length 2712.2
  Top Layer w10: U1.17@3414.15,3730.08 3442.78,3730.08 3451.76,3728.3 3460.21,3724.79 3467.82,3719.71 3488.38,3699.15 3493.46,3691.54 3496.96,3683.09 3498.75,3674.12 3498.75,2717.44 3500.53,2708.47 3504.03,2700.02 3509.12,2692.41 3529.38,2672.15 3536.99,2667.07 3545.44,2663.57 3554.41,2661.78 4536.78,2661.78 4545.76,2659.99 4554.21,2656.49 4561.82,2651.41 MK4.4@4618.85,2594.38 ; MK4.4@4610.31,2602.91 ccw(c4630.92,2623.52) MK4.4@4630.92,2594.38 ; MK4.4@4619.85,2593.38 MK4.4@4618.85,2594.38 ; MK4.3@4875.79,2594.38 MK4.4@4618.85,2594.38
  Bottom Layer w10: C29.2@4539.8,2595.33 MK4.4@4618.9,2595.33 ; R15.1@4640.8,2691.12 4640.8,2615.39 MK4.4@4620.74,2595.33 ; MK4.4@4618.9,2595.33 MK4.4@4619.79,2594.38 MK4.4@4620.74,2595.33 ; MK4.4@4618.9,2595.33 MK4.4@4620.74,2595.33
NRST1: C5.2 KEY1.1 R1.2 U1.7 | length 1195.4
  Top Layer w10: KEY1.1@2680.85,4500.08 2681.2,4396.46 2683.82,4390.18 2688.64,4385.38 2694.93,4382.78 2777.47,4382.78 2783.75,4380.18 2788.55,4375.38 2791.15,4369.1 2791.15,4181.14 2792.93,4172.17 2796.43,4163.72 2801.52,4156.11 v1(2904.8,4052.78) ; U1.7@3158.25,3651.38 v1@3158.25,3733.78
  Bottom Layer w10: v1(2904.8,4052.78) 3068.09,4052.78 3077.06,4050.99 3085.51,4047.49 3093.12,4042.41 3147.88,3987.65 3152.96,3980.04 3156.46,3971.59 3158.25,3962.62 v1@3158.25,3733.78
  other v1: 3158.26,3733.75
NRST2: C10.2 KEY2.1 R2.2 U2.7 | length 514.4
  Top Layer w10: v1(4555.93,4432.14) 4555.93,4224 4559.01,4216.56 v1(4567.8,4207.78) ; v1@4555.95,4432.18 4555.95,4486.42 4558.55,4492.65 4563.35,4497.4 4569.6,4499.94 C10.2@4623.85,4499.38
  Bottom Layer w10: R2.2@4467.45,4430.78 4554.55,4430.78 v1@4555.95,4432.18 ; v1(4567.8,4207.78) 4585.7,4207.78 4592.45,4209.12 4598.81,4211.75 4604.53,4215.57 U2.7@4625.35,4236.4
OLED_CS: OLED1.7 U2.14 | length 469.9
  Top Layer w10: v1(4733.35,4049.38) 4733.35,3756.14 4735.13,3747.17 4738.63,3738.72 4743.72,3731.11 OLED1.7@4807.35,3667.48
  Bottom Layer w10: U2.14@4681.03,4069.37 4693.43,4057 4699.02,4053.27 4705.23,4050.69 4711.83,4049.38 v1(4733.35,4049.38)
OLED_DC: OLED1.6 U2.19 | length 311.7
  Bottom Layer w10: U2.19@4611.44,3999.77 4797.54,3813.69 4802.35,3806.49 4805.66,3798.5 4807.35,3790.01 OLED1.6@4807.35,3767.48
OLED_MOSI: OLED1.4 U2.17 | length 191.1
  Bottom Layer w10: U2.17@4639.25,4027.58 4688.98,3977.85 4696.59,3972.77 4705.04,3969.26 4714.01,3967.48 OLED1.4@4807.35,3967.48
OLED_RES: OLED1.5 U2.18 | length 240.8
  Bottom Layer w10: U2.18@4625.35,4013.68 4761.9,3877.13 4768.98,3872.4 4776.84,3869.14 4785.19,3867.48 OLED1.5@4807.35,3867.48
OLED_SCK: OLED1.3 U2.15 | length 166.3
  Bottom Layer w10: U2.15@4667.15,4055.48 4686.78,4035.85 4694.39,4030.77 4702.84,4027.26 4711.81,4025.48 4750.68,4025.48 4759.66,4027.26 4768.11,4030.77 4775.72,4035.85 OLED1.3@4807.35,4067.48
S$81355: 
SPI3_MOSI: K1.DIN R20.1 U1.53 | length 1953.3
  Top Layer w10: v1(2785.8,3880.78) 2841.29,3936.3 2848.89,3941.39 2857.34,3944.89 2866.31,3946.68 U1.53@2961.42,3946.68
  Bottom Layer w10: K1.DIN@2231.75,2883.78 2083.41,2883.78 2074.44,2885.57 2065.99,2889.07 2058.38,2894.15 1932.12,3020.41 1927.03,3028.02 1923.53,3036.47 1921.75,3045.44 1921.75,3182.12 1923.53,3191.09 1927.03,3199.54 1932.12,3207.15 2205.38,3480.41 2212.99,3485.49 2221.44,3488.99 2230.41,3490.78 2519.08,3490.78 2528.06,3492.57 2536.51,3496.07 2544.12,3501.15 2753.38,3710.41 2758.46,3718.02 2761.96,3726.47 2763.75,3735.44 2763.75,3846.89 2765.2,3854.16 2768.04,3861.01 2772.17,3867.16 v1(2785.8,3880.78)
SPIN1: C30.2 R19.1 SW1.E U1.50 | length 614.6
  Top Layer w10: SW1.E@2558.75,4242.18 2747.46,4242.74 2753.73,4240.16 2758.53,4235.37 2761.13,4229.11 2761.13,4167.11 2762.91,4158.13 2766.41,4149.68 2771.5,4142.07 2897.48,4016.09 2905.09,4011.01 2913.54,4007.51 2922.51,4005.72 U1.50@2961.42,4005.72
  Bottom Layer w10: C30.2@2487.3,4241.78 2487.78,4242.21 SW1.E@2558.79,4242.21
SW1_A: R11.2 R21.2 SW1.A | length 149.5
  Top Layer w10: R11.2@2281.89,3671.34 SW1.A@2358.79,3671.34
  Bottom Layer w10: SW1.A@2358.79,3671.34 R21.2@2358.79,3743.96
SW1_B: R12.1 R22.2 SW1.B | length 146.2
  Top Layer w10: SW1.B@2558.79,3671.34 2631.7,3671.34 R12.1@2632.09,3671.78
  Bottom Layer w10: SW1.B@2558.79,3671.34 R22.2@2558.79,3743.97
SWCLK1: DEBUG1.2 U1.49 | length 543.6
  Top Layer w10: U1.49@2961.42,4025.41 2998.24,4025.41 3005.38,4028.37 3010.84,4033.83 3013.8,4040.96 v1(3013.8,4209.78)
  Bottom Layer w10: DEBUG1.2@2950.06,4500.05 2950.06,4288.18 2951.84,4279.21 2955.34,4270.76 2960.43,4263.15 v1(3013.8,4209.78)
SWCLK2: DEBUG2.2 U2.37 | length 552
  Bottom Layer w10: DEBUG2.2@3887.55,4500.08 3970.98,4416.65 3978.59,4411.57 3987.04,4408.06 3996.01,4406.28 4050.98,4406.28 4059.96,4404.49 4068.41,4400.99 4076.02,4395.91 U2.37@4305.21,4166.8
SWDIO1: DEBUG1.3 pad.2 U1.46 | length 429.9
  Top Layer w10: DEBUG1.3@3050.06,4500.05 3069.52,4480.59 3069.52,4227.81 3072.12,4221.54 3076.92,4216.74 3079.52,4210.47 pad.2@3079.52,4104.14 ; DEBUG1.3@3060.98,4489.13 cw(c3040.38,4468.52) 3069.52,4468.52
SWDIO2: DEBUG2.3 U2.34 | length 618.5
  Top Layer w10: DEBUG2.3@3987.57,4500.05 4368.58,4119.03 4370.8,4113.69 v1(4370.8,4104.78)
  Bottom Layer w10: U2.34@4333.05,4055.45 4370.8,4093.23 v1(4370.8,4104.78)
U1_5: C11.1 U1.5 X1.3 | length 238.7
  Top Layer w10: X1.3@3085.45,3443.28 3118.39,3476.3 3123.47,3483.91 3126.96,3492.37 3128.75,3501.34 3128.75,3525.72 3126.96,3534.69 3123.46,3543.14 3118.38,3550.75 3103.02,3566.11 3100.42,3572.38 3100.42,3579.18 3103.02,3585.45 3109.24,3591.67 3113.83,3598.55 3117.17,3606.61 3118.85,3615.02 U1.5@3118.85,3651.38
U1_6: C12.1 U1.6 X1.1 | length 155
  Top Layer w10: U1.6@3138.55,3651.38 3138.55,3617.14 3140.33,3608.17 3143.83,3599.72 3148.92,3592.11 C12.1@3166.24,3574.78 3172.1,3568.92 X1.1@3172.1,3512.21 ; U1.6@3138.58,3651.4 U1.6@3141.28,3648.7
U1_60: R3.2 U1.60 | length 122.6
  Top Layer w10: R3.2@2861.4,3749.78 2910.17,3798.5 2917.77,3803.58 2926.23,3807.09 2935.2,3808.87 U1.60@2961.42,3808.88
U1RX: U1.25 U2.30 | length 1019.9
  Top Layer w10: U1.25@3414.15,3887.58 4185.82,3887.58 4192.35,3890.28 4197.34,3895.28 4203.87,3897.98 v1@4286.95,3897.98
  Bottom Layer w10: v1(4286.97,3898) U2.30@4388.73,3999.77
U1TX: U1.24 U2.31 | length 1020.1
  Top Layer w10: U1.24@3414.15,3867.78 v1(4214.8,3867.78)
  Bottom Layer w10: v1@4214.75,3867.78 4271.14,3924.17 4277.44,3926.78 4284.26,3926.78 4290.56,3929.39 U2.31@4374.81,4013.69
U2_5: C21.1 U2.5 X2.3 | length 243.8
  Bottom Layer w10: U2.5@4597.51,4264.23 4613.16,4279.88 4617.89,4286.94 4621.14,4294.8 4622.8,4303.14 4622.8,4381.56 4624.58,4390.53 4628.08,4398.98 4633.17,4406.59 4680.91,4454.33 4689.19,4457.76 X2.3@4703.02,4457.77
U2_6: C20.1 U2.6 X2.1 | length 231.5
  Bottom Layer w10: U2.6@4611.44,4250.31 C20.1@4675.92,4314.78 ; C20.1@4676.19,4314.78 4695.86,4334.41 4703.47,4339.49 4711.92,4342.99 4720.9,4344.78 4730.88,4344.78 4739.85,4346.56 4748.31,4350.06 4755.91,4355.15 X2.1@4789.63,4388.87
U2_44: R4.1 U2.44 | length 77.6
  Bottom Layer w10: R4.1@4349.45,4319.78 4349.45,4317.38 U2.44@4402.65,4264.23
USB_DN: D2.3 R6.2 U1.44 | length 306.4
  Top Layer w10: U1.44@3118.89,4104.15 3118.89,4143.31 3120.67,4152.28 3124.18,4160.73 3129.26,4168.34 3155.02,4194.1 3160.1,4201.71 3163.6,4210.16 3165.39,4219.13 v1@3165.39,4247.37
  Bottom Layer w10: v1(3165.8,4247.78) R6.2@3165.8,4395.43
USB_DP: D2.2 R5.2 R7.2 U1.45 | length 598.9
  Top Layer w10: U1.45@3099.24,4104.18 R7.2@3099.24,4244.58 ; R7.2@3099.4,4244.78 v1(3099.45,4291.17) ; 3099.45,4276.08 cw(c3114.45,4276.08) 3114.45,4291.08 ; v1@3099.53,4291.08 3150.72,4291.08 3159.7,4292.86 3168.15,4296.37 3175.76,4301.45 3284.72,4410.41 3292.33,4415.49 3300.78,4419 3309.75,4420.78 R5.2@3438.19,4420.78
VBUS: D2.4 FUSE1.1 USB1.A4 USB1.A9 USB1.B4 USB1.B9 | length 1500.5
  Top Layer w10: D2.4@3240.2,4204.47 3308.07,4204.47 3317.04,4206.26 3325.5,4209.76 3333.1,4214.84 v1(3368.45,4250.18)
  Bottom Layer w10: USB1.A4@3368.42,4300.69 v1(3368.45,4250.18) 3389.39,4229.16 3396.99,4224.07 3405.44,4220.57 3414.41,4218.78 3649.08,4218.78 3658.06,4220.56 3666.51,4224.06 3674.12,4229.14 3724.46,4279.39 3726.85,4285.16 FUSE1.1@3726.81,4294.78 ; 3380.25,4263.45 ccw(c3409.46,4263.45) 3388.76,4242.83 ; USB1.B9@3380.23,4300.69 3380.25,4251.38 3394.79,4236.77 3401.37,4232.37 3408.68,4229.33 3416.44,4227.78 3645.18,4227.78 3654.16,4229.56 3662.61,4233.07 3670.22,4238.15 FUSE1.1@3726.81,4294.78 ; USB1.B4@3557.35,4300.68 3557.35,4272.79 3558.88,4265.07 3561.89,4257.81 3566.26,4251.26 3571.83,4245.7 3578.37,4241.33 3585.64,4238.31 3593.36,4236.78 3642.08,4236.78 3651.06,4238.56 3659.51,4242.07 3667.12,4247.15 FUSE1.1@3714.75,4294.78 ; USB1.A9@3569.21,4300.7 3569.25,4269.76 3570.26,4264.63 3572.26,4259.79 3575.15,4255.44 3578.84,4251.73 3583.18,4248.81 3588,4246.8 3593.13,4245.78 3639.08,4245.78 3648.06,4247.56 3656.51,4251.07 3664.12,4256.15 3700.54,4292.57 3705.87,4294.78 FUSE1.1@3714.75,4294.78 ; FUSE1.1@3714.75,4294.78 FUSE1.1@3726.81,4294.78
VCC: C1.1 C2.1 C3.1 C4.1 C6.2 C7.2 C8.1 C9.2 C13.2 C16.1 C17.1 C31.2 C32.2 DEBUG1.4 DEBUG2.4 FPC1.1 OLED1.2 R1.1 R2.1 R7.1 R8.2 R9.1 R10.1 R13.1 R14.1 R15.2 R16.2 R17.2 R18.2 R19.2 U1.1 U1.13 U1.19 U1.32 U1.48 U1.64 U2.1 U2.9 U2.24 U2.36 U2.48 U6.2 U6.4 | length 11276.8
  Top Layer w10: v1(2752.79,3568.78) 2903.78,3719.76 2911.38,3724.84 2919.84,3728.34 2928.81,3730.13 U1.64@2961.42,3730.14 ; R19.2@2820.45,4242.78 2840.04,4262.37 2845.12,4269.98 2848.62,4278.43 2850.41,4287.4 2850.41,4369.1 2853.01,4375.38 2857.81,4380.18 2864.08,4382.78 v1(3040.15,4382.78) R7.1@3040.09,4244.78 3040.14,4104.19 3040.15,3766.98 3013.7,3740.46 3006.1,3735.37 2997.65,3731.87 2988.68,3730.08 U1.64@2961.42,3730.14 ; 3024.55,3751.34 cw(c3031.01,3744.89) 3040.15,3744.89 ; 3025.15,4382.78 cw(c3025.15,4367.78) 3040.15,4367.78 ; 3031.63,3758.44 ccw(c3010.96,3779.05) 3040.15,3779.05 ; U1.1@3040.15,3651.38 3040.15,3766.96 3064.02,3766.96 3072.99,3768.74 3081.44,3772.24 3089.05,3777.33 3276.35,3964.62 ; 3040.15,3751.96 cw(c3055.15,3751.96) 3055.15,3766.96 cw(c3055.15,3781.96) 3040.15,3781.96 ; 3260.74,3949.02 cw(c3267.2,3942.55) 3276.35,3942.55 ; 3276.35,3821.71 cw(c3285.49,3821.71) 3291.95,3828.17 ; 3276.35,3855.85 ccw(c3305.49,3855.85) 3284.88,3835.24 ; 3276.35,3952.55 cw(c3305.49,3952.55) 3284.88,3973.16 ; 3276.35,3964.68 3309.79,3998.07 ; C1.1@3276.85,3505.28 3276.35,3505.78 3276.35,3651.38 3276.35,3843.78 ; 3328.61,4016.85 cw(c3349.22,3996.21) 3349.22,4025.38 ; v1(3337.13,4025.4) 3309.79,3998.07 ; U1.19@3414.15,3769.48 3365.31,3769.48 3356.34,3771.26 3347.89,3774.77 3340.28,3779.85 3276.35,3843.78 ; C3.1@3500.32,4025.38 ccw(c3500.32,4054.52) C3.1@3520.93,4033.92 ; C3.1@3509.19,4024.78 C3.1@3511.8,4024.78 ; v1(3562.8,4075.78) 3512.4,4025.38 3508.55,4025.38 3414.15,4025.38 v1(3337.13,4025.4) 3309.79,3998.07 ; R8.2@4711.19,4428.78 4711.16,4278.33 4712.94,4269.36 4716.44,4260.91 4721.53,4253.3 OLED1.2@4807.35,4167.48 ; 3276.35,3843.78 3276.35,3964.62 ; 3276.35,3964.62 3309.79,3998.07
  Bottom Layer w10: R9.1@2684.79,3498.44 2739.12,3498.44 2745.39,3501.03 2750.19,3505.84 2752.79,3512.11 v1(2752.79,3568.78) ; v1(3040.15,4382.78) 3150.06,4492.69 DEBUG1.4@3150.06,4500.05 ; C31.2@3257.7,3814.78 C32.2@3257.66,3883.89 ; C32.2@3257.7,3885.18 C32.2@3257.66,3883.89 ; v1(3337.13,4025.4) 3270.71,4025.71 3264.44,4023.14 3259.64,4018.37 3257.04,4012.11 3257.04,3955.97 C32.2@3257.66,3883.89 ; R13.1@3553.79,3455.44 4097.09,3455.44 4290.12,3455.44 4296.39,3458.03 4301.19,3462.84 4303.79,3469.11 4303.79,3655.25 4302.01,3664.22 4298.51,3672.67 4293.42,3680.28 4033.73,3939.97 ; v1@3562.75,4075.78 C13.2@3670.75,4075.38 ; R18.2@3696.79,2749.44 4011.79,2749.44 4013.79,2747.44 4326.79,2747.44 4329.79,2750.44 R15.2@4640.79,2750.44 ; FPC1.1@3697.32,3799.18 3878.27,3799.18 3887.24,3800.97 3895.7,3804.47 3903.3,3809.55 4033.73,3939.97 ; 4023.12,3929.37 cw(c4033.73,3918.76) 4044.33,3929.37 ; 4025.19,3931.44 ccw(c4004.59,3952.05) 4033.73,3952.05 ccw(c4062.87,3952.05) 4042.26,3931.44 ; U6.4@4033.73,4033.69 cw(c4042.87,4033.69) U6.4@4049.33,4040.15 ; U6.4@4033.73,4059.88 4033.73,3939.97 ; DEBUG2.4@4087.57,4500.05 4146.47,4441.15 4154.07,4436.07 4162.53,4432.56 4171.5,4430.78 R2.1@4406.35,4430.78 ; C9.2@4256.79,4030.33 4256.79,4034.86 U2.36@4305.21,4083.29 ; U2.36@4305.21,4083.29 4481.51,4259.62 ; 4391.35,4430.78 cw(c4391.35,4415.78) R2.1@4406.35,4415.78 ; C7.2@4406.35,4373.78 C7.2@4406.35,4371.88 ; C7.2@4406.35,4383.95 ccw(c4435.49,4383.95) C7.2@4414.88,4363.34 ; 4470.9,4249.01 cw(c4481.51,4238.41) 4492.12,4249.01 cw(c4502.72,4259.62) 4492.11,4270.23 ; 4472.71,4250.82 ccw(c4452.1,4271.43) 4481.25,4271.43 ; 4481.25,4259.88 4481.25,4284.64 4479.74,4292.19 4476.8,4299.31 4472.52,4305.71 U2.48@4458.32,4319.91 C7.2@4406.35,4371.88 ; 4481.25,4281.43 ccw(c4490.39,4281.43) 4496.85,4274.97 ; U2.1@4539.15,4312.58 4534.45,4312.58 4481.51,4259.62 ; 4546.74,4173.17 ccw(c4536.13,4183.78) 4546.74,4194.39 ; 4548.81,4175.24 cw(c4569.42,4154.64) 4569.42,4183.78 cw(c4569.42,4212.92) 4548.81,4192.32 ; C8.1@4595.25,3875.78 U2.24@4541.84,3930.17 4528.17,3943.8 4524.04,3949.95 4521.2,3956.8 4519.75,3964.07 4519.75,4131.52 4521.53,4140.49 4525.03,4148.94 4530.12,4156.55 4557.35,4183.78 ; R15.2@4640.75,2750.48 4704.58,2750.48 4713.56,2752.26 4722.01,2755.77 4729.62,2760.85 4958.48,2989.71 4963.56,2997.32 4967.06,3005.77 4968.85,3014.74 4968.85,3991.32 4967.06,4000.29 4963.56,4008.74 4958.48,4016.35 OLED1.2@4807.35,4167.48 ; U2.9@4653.15,4208.58 4637.86,4193.23 4630.95,4188.6 4623.27,4185.41 4615.11,4183.78 4557.35,4183.78 ; U2.9@4653.19,4208.56 4676.04,4231.41 4683.65,4236.49 4692.1,4239.99 4701.08,4241.78 4718.39,4241.78 4727.36,4239.99 4735.81,4236.49 4743.42,4231.41 OLED1.2@4807.35,4167.48 ; OLED1.2@4796.74,4178.09 ccw(c4807.35,4188.69) 4817.95,4178.09 ccw(c4828.56,4167.48) OLED1.2@4817.95,4156.87 ; C6.2@4896.85,4194.23 4848.44,4194.18 4839.63,4192.43 4831.34,4188.99 4823.87,4184 OLED1.2@4807.35,4167.48 ; C7.2@4406.35,4371.88 R2.1@4406.35,4428.98 ; R2.1@4406.35,4428.98 4408.15,4430.78 R2.1@4406.35,4430.78 ; R2.1@4406.35,4428.98 R2.1@4406.35,4430.78 ; 4481.51,4259.62 4557.35,4183.78
  Bottom Layer w30: C13.2@3670.79,4075.34 3683.45,4087.99 3689.16,4091.81 3695.51,4094.44 3702.26,4095.78 U6.2@3799.86,4095.78 ; U6.4@4033.72,4095.78 4033.75,4069.88 4063.33,4040.29 4071.34,4034.94 4080.24,4031.26 4089.68,4029.38 C17.1@4114.75,4029.38 ; C17.1@4114.79,4029.33 4185.79,4029.33 4255.79,4029.33 C9.2@4256.79,4030.33
  Bottom Layer w40: U6.2@3799.86,4095.78 U6.4@4033.72,4095.78
pads on no net: FPC1.7 FPC1.8 K1. K2. K3. K4. K4.DOUT U1.2 U1.3 U1.4 U1.8 U1.9 U1.10 U1.11 U1.21 U1.22 U1.23 U1.26 U1.27 U1.28 U1.29 U1.30 U1.35 U1.36 U1.39 U1.40 U1.41 U1.42 U1.43 U1.51 U1.52 U1.54 U1.55 U1.61 U1.62 U2.2 U2.3 U2.4 U2.10 U2.11 U2.12 U2.13 U2.16 U2.20 U2.21 U2.22 U2.25 U2.26 U2.27 U2.28 U2.29 U2.32 U2.33 U2.38 U2.39 U2.40 U2.41 U2.42 U2.43 U2.45 U2.46 USB1. USB1.A5 USB1.A8 USB1.B5 USB1.B8

## Polygon pours and split planes (outlines as drawn)
GND on Bottom Layer (solid): 1593.75,4781.32 5437.58,4781.32 5437.58,1593.75 1687.5,1593.75 1593.75,1500
GND on Top Layer (solid): 1593.75,4781.32 5437.58,4781.32 5437.58,1687.5 5531.34,1593.75 1500,1593.75

## Keep-outs
Keep-Out Layer:
  lines w10: 1829.03,1954.99 ccw(c1947.14,1954.99) 1947.14,1836.88 ; 1829.03,4478.57 cw(c1947.14,4478.57) 1947.14,4596.68 ; 4984.51,1836.88 ccw(c4984.51,1954.99) 5102.62,1954.99 ; 4984.51,4596.68 cw(c4984.51,4478.57) 5102.62,4478.57